# Altium PCB led_supply.PcbDoc
Units mm, origin at the board's own origin, x right, y up, seen from the top; angles counter-clockwise.
Board outline 77 x 77 mm, 2 copper layers (Top Layer, Bottom Layer), stack 1.536 mm thick; 20 components, 7 nets, 44 pads, 239 vias.
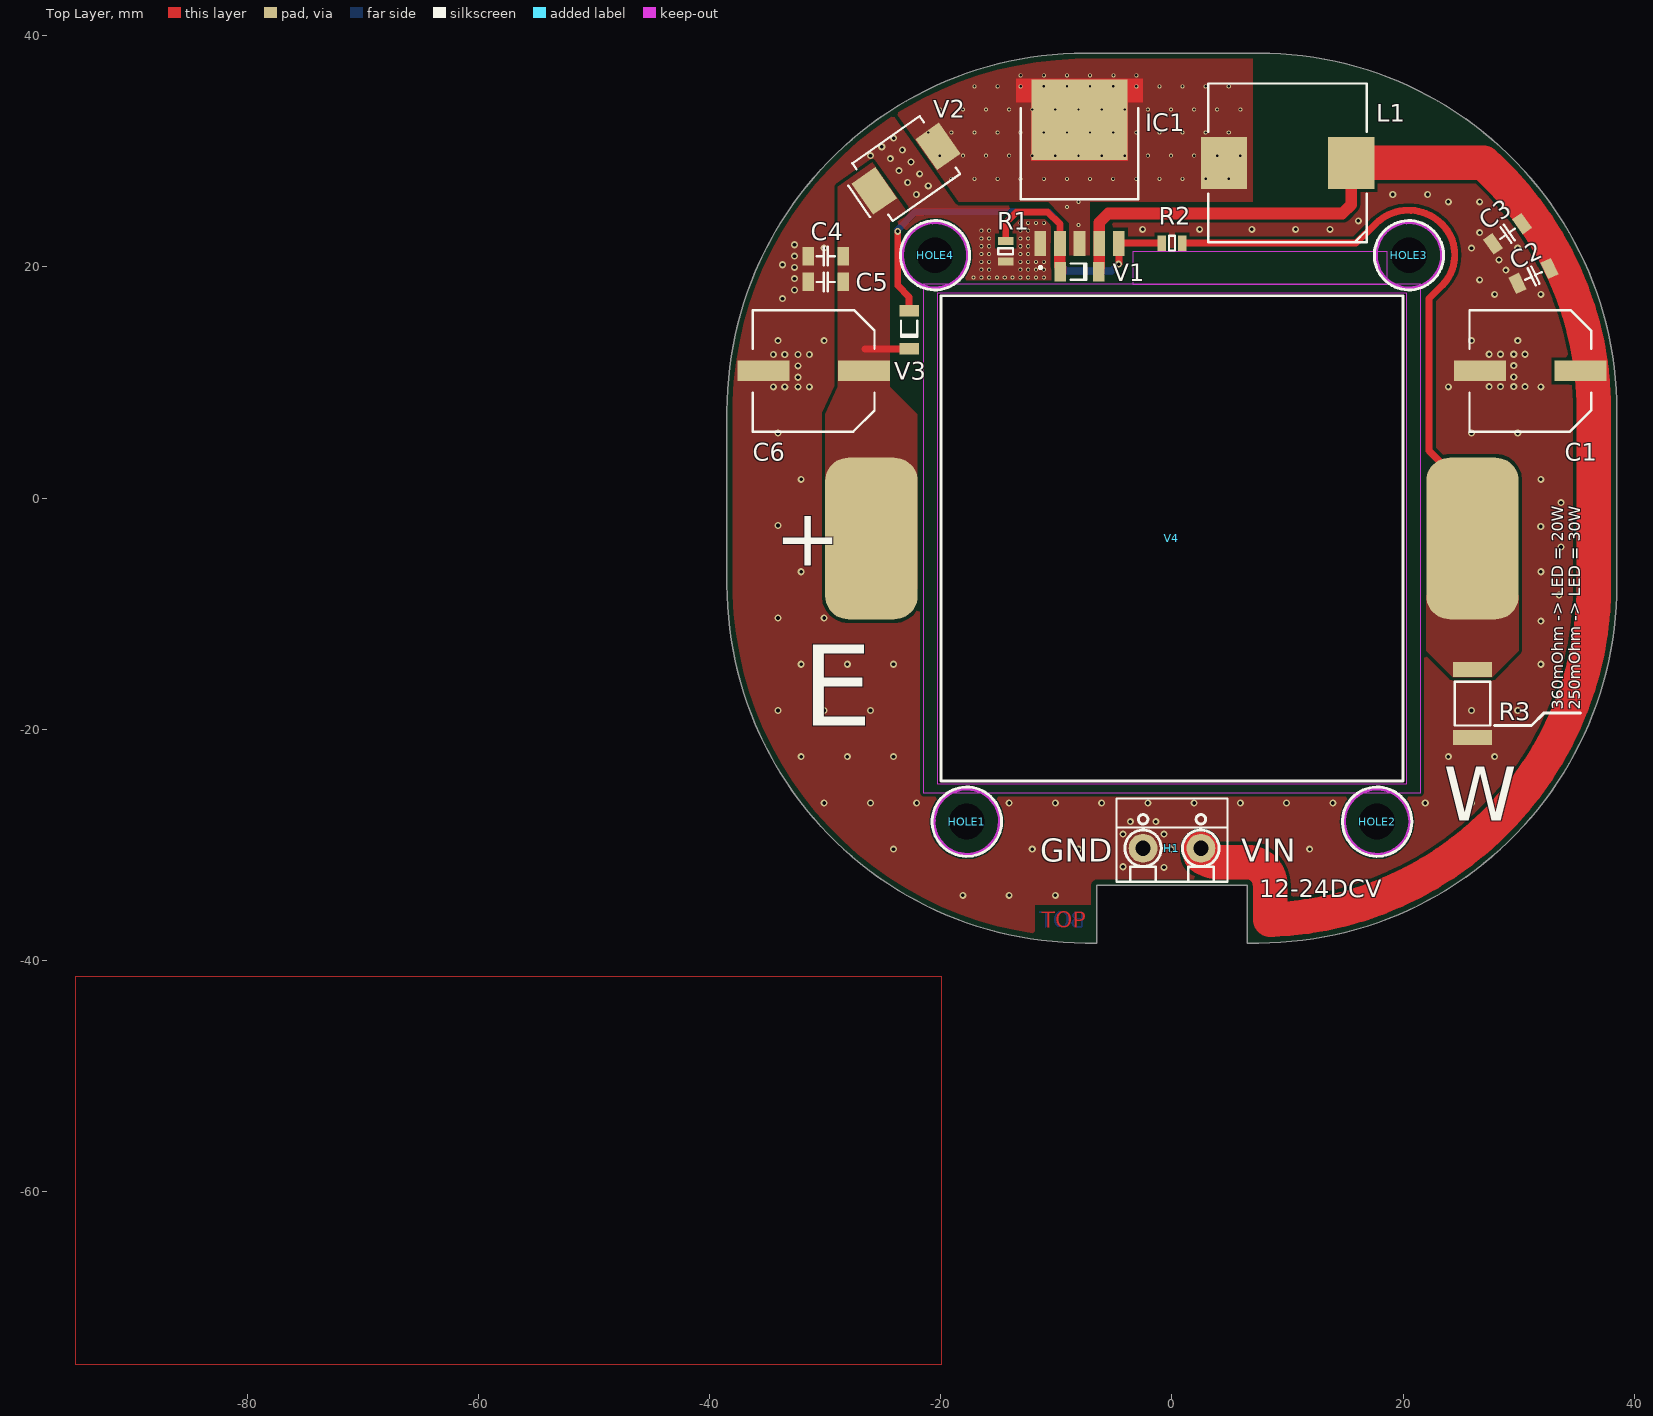
[diagram p0: Top Layer view]
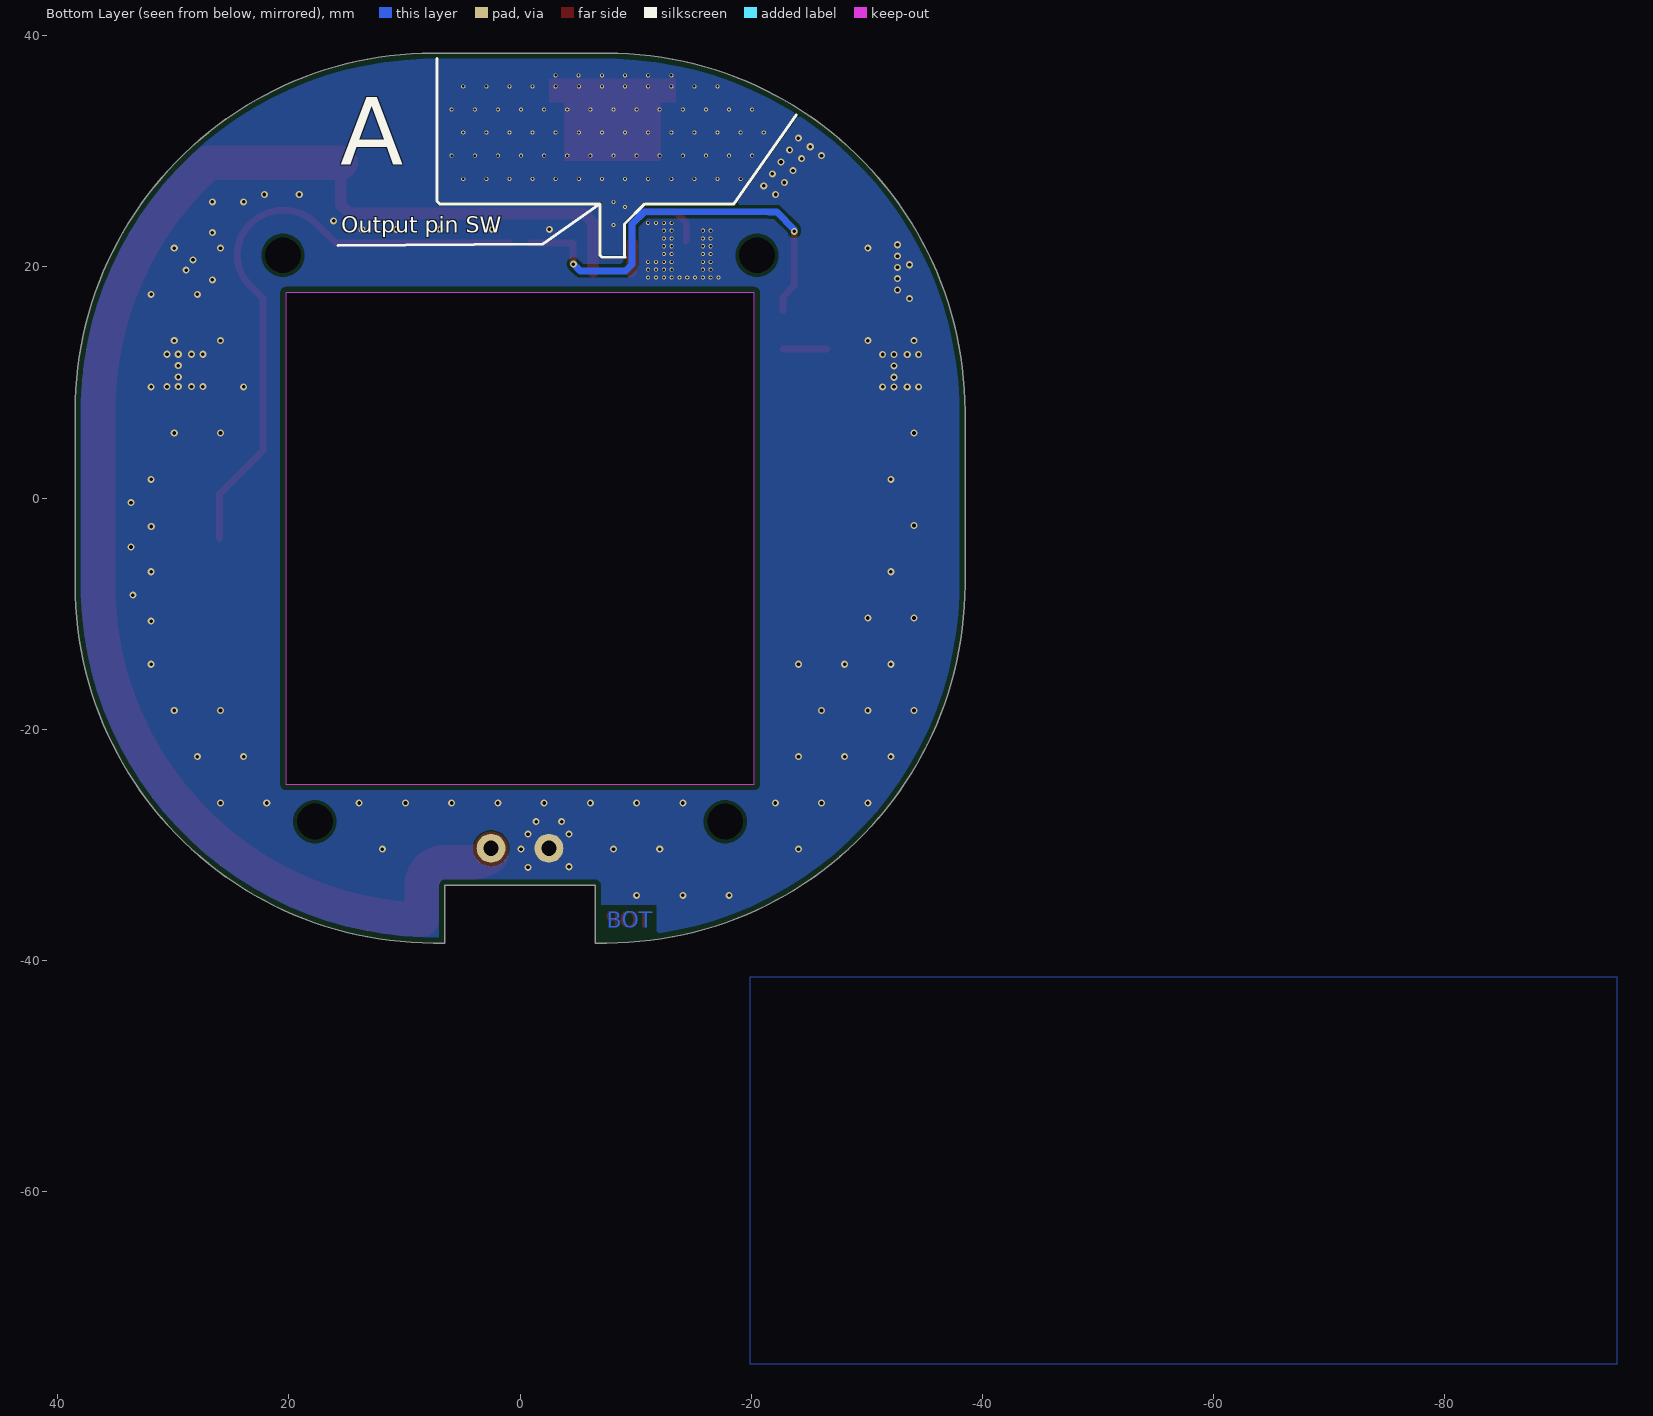
[diagram p1: Bottom Layer view, seen from below]
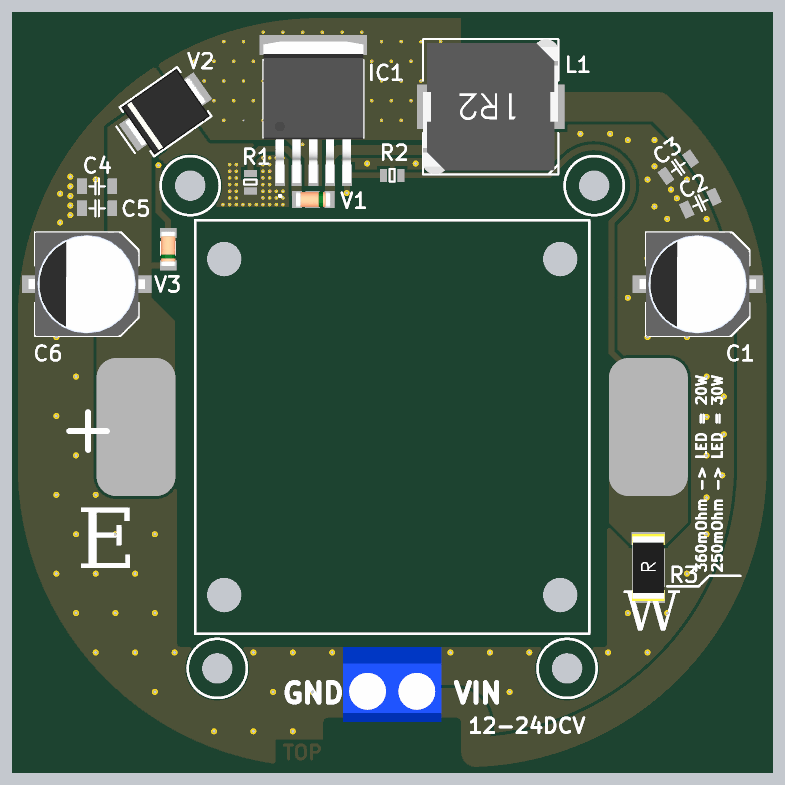
[diagram p2: 3D render of the assembled board from above, using the file's embedded part models]

## Layer stack, top to bottom
Top Solder: solder mask 0.0102, Solder Resist, Dk 3.5
Top Layer: signal copper 0.018
Dielectric1: core 1.5, FR-4, Dk 4.1
Bottom Layer: signal copper 0.018
Bottom Solder: solder mask 0.0102, Solder Resist, Dk 3.5

## Board outline
-38.5,-7.5 ccw(c-7.5,-7.5) -7.5,-38.5 -6.5,-38.5 -6.5,-33.5 6.5,-33.5 6.5,-38.5 7.5,-38.5 ccw(c7.5,-7.5) 38.5,-7.5 38.5,7.5 ccw(c7.5,7.5) 7.5,38.5 -7.5,38.5 ccw(c-7.5,7.5) -38.5,7.5
cut-out: -20.25,-24.75 -20.25,17.75 20.25,17.75 20.25,-24.75

## Design rules (kind name [scope] priority, off if disabled: settings)
BoardOutlineClearance [All] p1: gap=0.5 ignorepadtopadclearanceinfootprint=FALSE
Clearance [All] p1: gap=0.3 ignorepadtopadclearanceinfootprint=FALSE
HoleSize [All] p1: absolutevalues=TRUE maxlimit=7.62 minlimit=0.025 maxpercent=80.000 minpercent=20.000
MinimumSolderMaskSliver [All] p1: minsoldermaskwidth=0.08
PlaneClearance [All] p1: clearance=0.5
PolygonConnect [All] p1: connectstyle=Direct reliefconductorwidth=0.3 reliefentries=4 polygonreliefangle="45 Angle" airgapwidth=0.3
RoutingVias [All] p1: holewidth=0.4 width=0.6 viastyle="Through Hole" minholewidth=0.3 minwidth=0.6 maxholewidth=0.3 maxwidth=1.2
SilkToSilkClearance [All] p1: silktosilkclearance=0.1
SilkToSolderMaskClearance [IsPad] p1: minsilkscreentomaskgap=0.1 clearancetoexposedcopper=TRUE
SolderMaskExpansion SolderMaskExpansion_1 [InComponent('H1')] p1: expansion=0.2 istentingtop=FALSE
SolderMaskExpansion [All] p2: expansion=0 istentingtop=FALSE soldermaskfromhole=TRUE
Width [All] p1: maxlimit=3 minlimit=0.2 preferedwidth=0.3 minimp=50.000000 maximp=50.000000 favimp=50.000000
25 further rules are at their usual default settings.

## Components (designator, comment, footprint, x,y, rotation, side; value= is the part's Value field where it differs from the comment)
C1 "100u" sm_cap_elyt10m 31,11 r270 top
C2 "1.00u" sm_cap_1206 31.277,19.211 r25 top
C3 "100n" sm_cap_1206 29.032,22.86 r35 top
C4 "1.00u" sm_cap_1206 -29.947,20.93 r0 top
C5 "100n" sm_cap_1206 -29.947,18.694 r0 top
C6 "100u" sm_cap_elyt10m -31,11 r270 top locked
H1 "DG301-5.0" TH_CON_2PIN_PIT197 0,-30.3 r180 top
HOLE1 "HOLE_30" TH_MCH_HOLE30M -17.75,-28 r90 top
HOLE2 "HOLE_30" TH_MCH_HOLE30M 17.75,-28 r90 top
HOLE3 "HOLE_30" TH_MCH_HOLE30M 20.5,21 r90 top
HOLE4 "HOLE_30" TH_MCH_HOLE30M -20.5,21 r90 top
IC1 "XL6006" XL6006 -8,34.5 r270 top locked
L1 "47u" sm_ind_SRP1270 10,29 r180 top locked
R1 "20.0k" sm_res_0805 -14.385,21.343 r90 top
R2 "1.00k" sm_res_0805 0,22.049 r180 top
R3 "360m" SM_RES_2512 26,-17.777 r90 top
V1 "BZV55C8V2" sm_dio_minimelf_d59_l140 -8.002,19.583 r0 top
V2 "B560C-13-F" sm_dio_smc -23,28.5 r215 top
V3 "BZV55C39" sm_dio_minimelf_d59_l140 -22.738,14.554 r270 top
V4 "LED" PWR_LED -20,-24.5 r0 top locked

## Footprints (in the part's own frame and the unit in brackets; to place one, negate y for a bottom-side part, rotate by r counter-clockwise, add the part's x,y. Pads: shape width x height; smd on the part's side, far side on the other; paste and mask are expansions set on the pad)
PWR_LED [mm]
  rrect50% 8x14 smd: 1(-6,21) 2(46,21)
  round 1.524 hole 3.5 unplated: ""(2.95,3.95) ""(2.95,38.05) ""(37.05,3.95) ""(37.05,38.05)
  silkscreen extent 0,0 40,42, body extent -6,0 46,42, height 1.9
sm_cap_1206 [mil]
  rect 39x63 smd: 1(-60,0) 2(60,0)
  silkscreen extent -31,-32 31,32, body extent -61,-32 61,32, height 70
sm_cap_elyt10m [mil] "SMD electrolytic capacitor dia 10mm"
  rect 70x177 smd: 1(0,171) 2(0,-171)
  silkscreen extent -207,-207 207,207, body extent -207,-232 207,232, height 408
sm_dio_minimelf_d59_l140 [mm] "Metal Electrode Face (MELF) Diode; Body 3.5 x 2.0 mm (LxDia), SOD80C"
  rect 1x1.7 smd: 1(-1.65,0) 2(1.65,0)
  silkscreen extent -0.77,-0.7 0.6,0.7, body extent -1.78,-0.82 1.73,0.83, height 1.64
sm_dio_smc [mm]
  rect 2.5x3.3 smd: 1(-3.365,0) 2(3.365,0)
  silkscreen extent -3.56,-3.05 4.95,3.05, body extent -3.98,-2.95 3.98,2.95, height 2.3
sm_ind_SRP1270 [mm] "Shielded Power Inductor"
  rect 4x4.5 smd: 1(-5.5,0) 2(5.5,0)
  silkscreen extent -6.86,-6.86 6.86,6.86, body extent -6.85,-6.85 6.85,6.85, height 7.01
sm_res_0805 [mil]
  rect 28x52 smd: 1(-35,0) 2(35,0)
  silkscreen extent -10,-25 10,25, body extent -41,-26 41,26, height 19
SM_RES_2512 [mm] "Chip Resistor, Body 6.3x3.2mm, IPC Medium Density"
  rect 1.3x3.4 smd: 1(-2.95,0) 2(2.95,0)
  silkscreen extent -1.9,-1.52 1.88,1.52, body extent -3.39,-1.66 3.41,1.64, height 0.64
TH_CON_2PIN_PIT197 [mm] "DG301-5 connector with srews 1,5mm wire"
  round 2.5 hole 1.3: 1(-2.5,0) 2(2.5,0)
  silkscreen extent -4.8,-4.3 4.8,2.9, body extent -5,-4.48 5,3.12, height 10.03
TH_MCH_HOLE30M [mm] "Hole dia 3mm, non-plated"
  round 0 hole 3.1 unplated: 1(0,0)
XL6006 [mm]
  rect 2.16x1.02 smd: 1(12.461,-3.4) 2(12.461,-1.7) 3(12.461,0) 4(12.461,1.7) 5(12.461,3.4)
  rect 6.99x8.33 smd paste+0 mask+0.102: 3(1.778,0)
  Top Layer region: -1.778,-5.461 -1.778,5.461 0.254,5.461 0.254,4.191 5.334,4.191 5.334,-4.191 0.254,-4.191 0.254,-5.461
  silkscreen extent 0.76,-5.08 14.68,5.08, body extent -1.11,-5.08 13.24,5.08, height 4.72

## Part data
C1 C6: library part CAP_000411, "CAP ELYT 47u 50V low ESR 10mm", Dielectric=elyt, Manuf Part Number=EEE-FC1H470P, Manufacturer=Panasonic, Max Oper Temperature=105, Min Oper Temperature=-40, Supp Part number=PCE4020CT-ND, Tolerance=20%, Voltage=63V, Active=1, Alternative=1, Cat1=Electrolytic, Cat2=G, ComponentLink1Description=Datasheet, ComponentLink1URL=https://riceproject.fel.zcu.cz/Altium/PDF/Passive/Capacitors/panasonic_FC.pdf, Designer="Jiri  Cengery", Exact price=1, Exact price 2=0, Exact price 3=0, FIT=2, ID=2290, LastRevisionDate=11.5.2011, LastRevisionNote="new release", ManufacturerID=Panasonic, ManufacturerURL=http://www.industrial.panasonic.com/, Marking=47HFC, Part Category=Electrolytic/G, Part Number=CAP_000411, Part Select=SCAP0003000700002470, Part type=CAP, PartNumber=CAP_000411, PartQuantity=1, PCB Status=Electrical, Preference=-1000, Price=19, Price 2=0, Price 3=0, Published=11.5.2011, Publisher="Libor Polacek", RoHS=1, Stock=21, Supplier=Digikey, Supplier2=N/A, Supplier3=N/A, SupplierID=Digikey, SupplierID2="no supplier", SupplierID3="no supplier", SupplierURL=http://www.digikey.com/, SupplierURL2=N/A, SupplierURL3=N/A
C2 C4: library part CAP_000356, "CAP CER 1.00u 100V X7R 10% 1206", Dielectric=X7R, Manuf Part Number=C3216X7R2A105K, Manufacturer="TDK Corporation", ManufacturerID=TDK, Max Oper Temperature=125, Min Oper Temperature=-55, Supp Part number=445-4467-2-ND, Tolerance=10%, Voltage=100V, Active=1, Alternative=1, Cat1=Ceramic, Cat2=1206, Cat3=X7R, ComponentLink1Description=Datasheet, ComponentLink1URL=https://riceproject.fel.zcu.cz/Altium/PDF/passive/capacitors/Cxxxx_TDK_100V.pdf, Designer=MaJa, Exact price=1, FIT=0,100000001490116, ID=360, LastRevisionDate=11.5.2011, LastRevisionNote="new release", ManufacturerURL=http://www.tdk.com/, Part Category=Ceramic/1206/X7R, Part Number=CAP_000356, Part Select=SCAP0001000500027100, Part type=CAP, PartNumber=CAP_000356, PartQuantity=1, PCB Status=Electrical, Price=2,24207997322083, Price 2=0, Price 3=0, Published=11.5.2011, Publisher="Libor Polacek", Quantity=1, RoHS=1, Stock=9, Supplier=Digikey, Supplier2=N/A, Supplier3=N/A, SupplierID=Digikey, SupplierID2="no supplier", SupplierID3="no supplier", SupplierURL=http://www.digikey.com/, SupplierURL2=N/A, SupplierURL3=N/A
C3 C5: library part CAP_000351, "CAP CER 100n 100V X7R 10% 1206", Dielectric=X7R, Manuf Part Number=12061C104KAT2A, Manufacturer=AVX, Max Oper Temperature=125, Min Oper Temperature=-55, Supp Part number=478-1529-2-ND, Tolerance=10%, Voltage=100V, Active=1, Alternative=1, Cat1=Ceramic, Cat2=1206, Cat3=X7R, ComponentLink1Description=Datasheet, ComponentLink1URL=https://riceproject.fel.zcu.cz/Altium/PDF/passive/capacitors/xxxxC_AVX.pdf, Designer=MaJa, Exact price=1, FIT=0,100000001490116, ID=355, LastRevisionDate=11.5.2011, LastRevisionNote="new release", ManufacturerID=AVX, ManufacturerURL=http://www.avx.com/, Part Category=Ceramic/1206/X7R, Part Number=CAP_000351, Part Select=SCAP0001000500026100, Part type=CAP, PartNumber=CAP_000351, PartQuantity=1, PCB Status=Electrical, Price=0,62279999256134, Price 2=0, Price 3=0, Published=11.5.2011, Publisher="Libor Polacek", Quantity=1, RoHS=1, Stock=0, Supplier=Digikey, Supplier2=N/A, Supplier3=N/A, SupplierID=Digikey, SupplierID2="no supplier", SupplierID3="no supplier", SupplierURL=http://www.digikey.com/, SupplierURL2=N/A, SupplierURL3=N/A
H1: library part CON_000079, "CON 2pin power 197mill", Manuf Part Number=DG301-5.0-02P-12, Manufacturer=DEGSON, Max Oper Temperature=120, Min Oper Temperature=-30, Supp Part number=DG301-5.0-2P12, Active=1, Alternative=1, Cat1=Power, ComponentLink1Description=Datasheet, ComponentLink1URL=https://riceproject.fel.zcu.cz/Altium/PDF/Passive/Connectors/dg301-5.0.pdf, Designer="Tomáš Košan", Exact price=1, ID=1796, LastRevisionDate=15.6.2011, LastRevisionNote="Initial version", ManufacturerID=DEGSON, ManufacturerURL=http://www.degson.com/, Part Category=Power, Part Number=CON_000079, Part Select=TCON0004000000001500, Part type=CON, PartNumber=CON_000079, PartQuantity=1, PCB Status=Electrical, Pin=2, Price=3,84999990463257, Price 2=0, Price 3=0, Published=15.6.2011, Publisher=Turjanica, RoHS=1, Stock=0, Supplier=TME, Supplier2=N/A, Supplier3=N/A, SupplierID=TME, SupplierID2="no supplier", SupplierID3="no supplier", SupplierURL=http://www.tme.eu/cz/, SupplierURL2=N/A, SupplierURL3=N/A
HOLE1 HOLE2 HOLE3 HOLE4: library part MCH_000055, "MCH test hole 3mm no pad", Manuf Part Number=x, ManufacturerID="no manufacturer", Max Oper Temperature=200, Min Oper Temperature=-60, Active=1, Alternative=1, Cat1=Virtual, Cat2="Mounting holes", ComponentLink1Description=Datasheet, Designer="Jiri Cengery", Exact price=0, Exact price 2=0, Exact price 3=0, FIT=0, Function Type=hole, ID=2632, LastRevisionDate=8.11.2013, LastRevisionNote="new release", Part Category="Virtual/Mounting holes", Part Number=MCH_000055, Part Select=TMCH0002000400000000, Part type=MCH, PartNumber=MCH_000055, PartQuantity=1, PCB Status=Virtual, Preference=0, Price=0, Price 2=0, Price 3=0, Publisher="Jiri Svarny", Publishied=8.11.2013, RoHS=1, Stock=0, Supp Part number=x, Supplier=N/A, Supplier2=N/A, Supplier3=N/A, SupplierID="no supplier", SupplierID2="no supplier", SupplierID3="no supplier", SupplierURL=N/A, SupplierURL2=N/A, SupplierURL3=N/A
IC1: "180KHz 60V 5A Switching Current Boost LED Constant Current Driver", Manufacturer_Name=Xlsemi, Datasheet Link=http://www.xlsemi.net/datasheet/XL6006%20datasheet-English.pdf, Manufacturer_Part_Number=XL6006
L1: library part IND_000080, "IND 47u 5A 13.7x13.7mm ferrite", DC Current=14A, Manuf Part Number=SRP1270-5R6M, Manufacturer="Bourns Inc.", ManufacturerID=Bourns, Max Oper Temperature=125, Min Oper Temperature=-55, Resistance=10m, Supp Part number=SRP1270-5R6MDKR-ND, Tolerance=20%, Active=1, Alternative=1, Cat1=Shielded, Cat2=Standard, ComponentLink1Description=Datasheet, ComponentLink1URL=https://riceproject.fel.zcu.cz/Altium/PDF/Passive/Inductors/SRP1270_Bourns.pdf, Designer="Jiri Svarny", Exact price=1, Exact price 2=0, Exact price 3=0, FIT=0,100000001490116, ID=4984, LasrRevisionNote="new release", LastRevisionDate=11.5.2011, ManufacturerURL=http://www.bourns.com, Part Category=Shielded/Standard, Part Number=IND_000080, Part Select=SIND0001000100005220, Part type=IND, PartNumber=IND_000080, PartQuantity=1, PCB Status=Electrical, Preference=1, Price=30,5, Price 2=0, Price 3=0, Publisher="Libor Polacek", Publishied=11.5.2011, RoHS=1, Stock=0, Supplier=Digikey, Supplier2=N/A, Supplier3=N/A, SupplierID=Digikey, SupplierID2="no supplier", SupplierID3="no supplier", SupplierURL=http://www.digikey.com/, SupplierURL2=N/A, SupplierURL3=N/A
R1: library part RES_000274, "RES 0805 20.0k 1% 100ppm SMD thick film", Manuf Part Number=ERJ6ENF2002V, Manufacturer=Panasonic, Max Oper Temperature=125, Min Oper Temperature=-55, Power=125mW, Supp Part number=P20.0kCTR-ND, Tolerance=1%, Active=1, Alternative=1, Cat1="Thick film", Cat2=0805, ComponentLink1Description=Datasheet, ComponentLink1URL=https://riceproject.fel.zcu.cz/Altium/PDF/passive/resistors/ERJ_EKF_Panasonic.pdf, Designer="Kamil Kosturik", Exact price=1, Exact price 2=0, Exact price 3=0, FIT=0,100000001490116, ID=635, LastRevisionDate=11.5.2011, LastRevisionNote="new release", ManufacturerID=Panasonic, ManufacturerURL=http://www.industrial.panasonic.com/, Part Category="Thick film/0805", Part Number=RES_000274, Part Select=SRES0001000400005200, Part type=RES, PartNumber=RES_000274, PartQuantity=1, PCB Status=Electrical, Preference=0, Price=0,0900000035762787, Price 2=0, Price 3=0, Published=11.5.2011, Publisher="Libor Polacek", Quantity=1, RoHS=1, Stock=70, Supplier=Digikey, Supplier2=N/A, Supplier3=N/A, SupplierID=Digikey, SupplierID2="no supplier", SupplierID3="no supplier", SupplierURL=http://www.digikey.com/, SupplierURL2=N/A, SupplierURL3=N/A, Thermal Stability=100ppm
R2: library part RES_000243, "RES 0805 1.00k 1% 100ppm SMD thick film", Manuf Part Number=ERJ6ENF1001V, Manufacturer=Panasonic, Max Oper Temperature=125, Min Oper Temperature=-55, Power=125mW, Supp Part number=P1.00kCTR-ND, Supp Part number 2=667-ERJ-6ENF1001V, Tolerance=1%, Active=1, Alternative=1, Cat1="Thick film", Cat2=0805, ComponentLink1Description=Datasheet, ComponentLink1URL=https://riceproject.fel.zcu.cz/Altium/PDF/passive/resistors/ERJ_EKF_Panasonic.pdf, Designer="Tomáš Košan", Exact price=1, Exact price 2=0, Exact price 3=0, FIT=0,100000001490116, ID=604, LastRevisionDate=11.5.2011, LastRevisionNote="new release", ManufacturerID=Panasonic, ManufacturerURL=http://www.industrial.panasonic.com/, Part Category="Thick film/0805", Part Number=RES_000243, Part Select=SRES0001000400004100, Part type=RES, PartNumber=RES_000243, PartQuantity=1, PCB Status=Electrical, Preference=0, Price=0,0900000035762787, Price 2=2,4300000667572, Price 3=0, Published=11.5.2011, Publisher="Libor Polacek", Quantity=1, RoHS=1, Stock=1225, Supplier=Digikey, Supplier2="Mouser Electronics", Supplier3=N/A, SupplierID=Digikey, SupplierID2=Mouser, SupplierID3="no supplier", SupplierURL=http://www.digikey.com/, SupplierURL2=http://www.mouser.com, SupplierURL3=N/A, Thermal Stability=100ppm
R3: library part RES_000543, "RES 2512 0.0R 1.5W SMD thick film", Manuf Part Number=CRCW25120000Z0EGHP, Manufacturer=Vishay, Max Oper Temperature=125, Min Oper Temperature=-55, Power=2W, Supp Part number=541-0.0RBCT-ND, Tolerance=1%, Active=1, Alternative=1, Cat1="Thick film", Cat2=2512, ComponentLink1Description=Datasheet, ComponentLink1URL=https://riceproject.fel.zcu.cz/Altium/PDF/passive/resistors/Resistor_Vishay.pdf, Designer="Jiri  Cengery", Exact price=0, FIT=1, ID=1743, LastRevisionDate=11.5.2011, LastRevisionNote="new release", ManufacturerID=Vishay, ManufacturerURL=http://www.vishay.com/, Marking=0, Part Category="Thick film/2512", Part Number=RES_000543, Part Select=SRES0001001000000000, Part type=RES, PartNumber=RES_000543, PartQuantity=1, PCB Status=Electrical, Preference=0, Price=16, Price 2=0, Price 3=0, Published=11.5.2011, Publisher="Libor Polacek", RoHS=1, Stock=0, Supplier=Digikey, Supplier2=N/A, Supplier3=N/A, SupplierID=Digikey, SupplierID2="no supplier", SupplierID3="no supplier", SupplierURL=http://www.digikey.com/, SupplierURL2=N/A, SupplierURL3=N/A, Thermal Stability=100ppm
V1 V3: library part DIO_000033, "DIO Diode zener 8V2; 500mW; miniMELF", Manuf Part Number=BZV55C8V2-TP, Manufacturer="Micro Commercial Components Corp.", ManufacturerID="Micro Commercial", Max Oper Temperature=150, Min Oper Temperature=-55, Supp Part number=BZV55C8V2-TPMSCT-ND, Voltage=8.2V, Active=1, Alternative=1, Cat1=Zener, ComponentLink1Description=Datasheet, ComponentLink1URL=https://riceproject.fel.zcu.cz/Altium/PDF/Semiconductor/Analog/Diode/Zener/BZV55C_MicroCommercial.pdf, Designer="Jiri Cengery", Exact price=1, Exact price 2=0, Exact price 3=0, FIT=2, ID=2320, LastRevisionDate=11.5.2011, LastRevisionNote="new release", ManufacturerURL=http://mccsemi.com, Part Category=Zener, Part Number=DIO_000033, Part Select=SDIO0003000000000000, Part type=DIO, PartNumber=DIO_000033, PartQuantity=1, PCB Status=Electrical, Preference=0, Price=3,1800000667572, Price 2=0, Price 3=0, Published=11.5.2011, Publisher="Libor Polacek", RoHS=1, Stock=44, Supplier=Digikey, Supplier2=N/A, Supplier3=N/A, SupplierID=Digikey, SupplierID2="no supplier", SupplierID3="no supplier", SupplierURL=http://www.digikey.com/, SupplierURL2=N/A, SupplierURL3=N/A
V2: library part DIO_000095, "DIO Schottky 40V 5A SMC", Current=5A, Manuf Part Number=B540C-13-F, Manufacturer="DIODES incorporated", Max Oper Temperature=150, Min Oper Temperature=-55, Supp Part number=1843671, Voltage=40V, Active=1, Alternative=1, Cat1=Schottky, ComponentLink1Description=Datasheet, ComponentLink1URL=https://riceproject.fel.zcu.cz/Altium/PDF/Semiconductor/Analog/Diode/2238476.pdf, Designer="Jiri  Cengery", Exact price=1, Exact price 2=0, Exact price 3=0, FIT=2, ID=5170, LastRevisionDate=11.5.2011, LastRevisionNote="new release", ManufacturerID="DIODES incorporated", ManufacturerURL=http://www.diodes.com, Part Category=Schottky, Part Number=DIO_000095, Part Select=SDIO0002000000000000, Part type=DIO, PartNumber=DIO_000095, PartQuantity=1, PCB Status=Electrical, Preference=0, Price=13, Price 2=0, Price 3=0, Published=11.5.2011, Publisher="Libor Polacek", RoHS=1, Stock=0, Supplier=Farnell, Supplier2=N/A, Supplier3=N/A, SupplierID=Farnell, SupplierID2="no supplier", SupplierID3="no supplier", SupplierURL=http://cz.farnell.com/, SupplierURL2=N/A, SupplierURL3=N/A
V4: "Power LED 20 - 100W (40x42mm))"

## Via types
v1: diameter 0.61, hole 0.315, Top Layer to Bottom Layer, 119 vias
v2: diameter 0.35, hole 0.2, Top Layer to Bottom Layer, 118 vias
v3: diameter 0.6, hole 0.3, Top Layer to Bottom Layer, 2 vias

## Nets (pads, with @x,y where several pads share a name; then routed paths per layer and width w, separated by ;. In a path a pad name is that pad's centre, name@x,y a point inside that pad or via, vN(x,y) a via of type N, cw(c..) or ccw(c..) an arc to the next point about the centre after c; other vN are vias at no path point)
EN: IC1.2 R1.2 V1.1 | length 11.2
  Top Layer w0.6: R1.2 -14.385,23.81 -13.451,24.744 -10.752,24.744 -9.7,23.692 IC1.2
  Top Layer w1: IC1.2 -9.7,20.007 -9.627,19.933 V1.1@-9.627,19.583
FB: IC1.5 R2.2 V3.1 | length 37.1
  Top Layer w0.6: v3(-23.724,23.063) -23.724,18.373 -22.738,17.387 V3.1 ; v3(-4.623,20.244) -4.6,20.267 IC1.5 -4.59,22.049 R2.2
  Bottom Layer w0.6: v3(-23.724,23.063) -23.724,23.241 -22.221,24.744 -21.5,24.744 -21.479,24.765 -10.747,24.765 -9.677,23.695 -9.677,20.193 -9.139,19.654 -5.212,19.654 v3(-4.623,20.244)
GND: C1.2 C2.1 C3.1 C4.1 C5.1 C6.2 H1.2 IC1.1 R1.1 R3.1
  other v1: -18.088,-34.381 -14.088,-34.381 -10.088,-34.381 -0.686,-31.953 -4.242,-31.9 -24.088,-30.381 -12.088,-30.381 -8.088,-30.381 -0.088,-30.381 11.912,-30.381 -4.242,-29.083 -0.686,-29.083 -3.6,-28 -1.4,-28 -30.088,-26.381 -26.088,-26.381 -22.088,-26.381 -14.088,-26.381 -10.088,-26.381 -6.088,-26.381 -2.088,-26.381 1.912,-26.381 5.912,-26.381 9.912,-26.381 13.912,-26.381 21.912,-26.381 25.912,-26.381 -32.088,-22.381 -28.088,-22.381 -24.088,-22.381 23.912,-22.381 27.912,-22.381 -34.088,-18.381 -30.088,-18.381 -26.088,-18.381 25.912,-18.381 29.912,-18.381 -32.088,-14.381 -28.088,-14.381 -24.088,-14.381 31.912,-14.381 31.912,-10.649 -34.088,-10.381 -30.088,-10.381 33.5,-8.407 -32.088,-6.381 31.912,-6.381 33.655,-4.242 31.902,-2.464 -34.088,-2.381 33.655,-0.406 -32.088,1.619 31.912,1.619 -34.088,5.619 25.912,5.619 29.912,5.619 -34.483,9.619 -33.503,9.619 -32.36,9.619 -31.379,9.619 23.912,9.619 27.442,9.634 28.423,9.634 29.566,9.634 30.546,9.634 31.912,9.619 -32.36,10.449 29.566,10.465 -32.36,11.43 29.566,11.445 -34.483,12.421 -33.503,12.421 -32.36,12.421 -31.379,12.421 27.442,12.436 28.423,12.436 29.566,12.436 30.546,12.436 -34.088,13.619 -30.088,13.619 25.912,13.619 29.912,13.619 -33.696,17.252 27.912,17.619 31.912,17.619 -32.664,18 26.619,18.879 -32.664,18.981 28.887,19.716 -32.664,19.949 -33.696,20.182 28.296,20.599 -32.664,20.93 -30.088,21.619 25.912,21.619 29.912,21.619 -32.664,21.91 26.619,22.962 -2.539,23.241 2.388,23.241 6.909,23.241 10.693,23.241 13.665,23.241 16.129,23.978 23.912,25.619 26.619,25.619 -22.119,26.264 19.101,26.264 22.123,26.264 -21.088,27.011 -22.867,27.295 -21.835,28.043 -23.615,28.326 -22.583,29.074 -24.362,29.358 -26.088,29.619 -23.331,30.106 -25.11,30.389 -24.079,31.137
  other v2: -17.175,19.075 -16.499,19.075 -15.822,19.075 -15.146,19.075 -14.47,19.075 -13.793,19.075 -13.117,19.075 -12.44,19.075 -11.764,19.075 -11.088,19.075 -16.499,19.752 -15.822,19.752 -13.117,19.752 -12.44,19.752 -11.764,19.752 -11.088,19.752 -16.499,20.428 -15.822,20.428 -13.117,20.428 -12.44,20.428 -11.764,20.428 -11.088,20.428 -16.499,21.105 -15.822,21.105 -13.117,21.105 -12.44,21.105 -16.499,21.781 -15.822,21.781 -13.117,21.781 -12.44,21.781 -16.499,22.457 -15.822,22.457 -13.117,22.457 -12.44,22.457 -16.499,23.134 -15.822,23.134 -13.117,23.134 -12.44,23.134 -13.117,23.81 -12.44,23.81 -11.764,23.81 -11.088,23.81
NetR2_1: R2.1 R3.2 V4.2 | length 53.6
  Top Layer w0.254: 23.363,23.678 cw(c20.588,20.892) 23.375,23.666
  Top Layer w0.6: R2.1 15.938,22.049 17.635,23.746 cw(c20.465,20.848) 23.362,23.678 ; 23.375,23.666 cw(c20.729,21.031) 23.375,18.397 22.25,17.272 22.25,4.089 26,0.34 V4.2
SW: IC1.3 L1.2 V2.1
  other v2: -8.088,23.619 -9.088,25.181 -8.088,25.619 -19.088,27.619 -17.088,27.619 -15.088,27.619 -13.088,27.619 -11.088,27.619 -9.088,27.619 -7.088,27.619 -5.088,27.619 -3.087,27.619 -1.087,27.619 0.913,27.619 2.913,27.619 4.913,27.619 -20.088,29.619 -18.088,29.619 -16.088,29.619 -14.088,29.619 -12.088,29.619 -10.088,29.619 -8.088,29.619 -6.088,29.619 -4.088,29.619 -2.087,29.619 -0.087,29.619 1.913,29.619 3.913,29.619 5.913,29.619 -21.088,31.619 -19.088,31.619 -17.088,31.619 -15.088,31.619 -13.088,31.619 -11.088,31.619 -9.088,31.619 -7.088,31.619 -5.088,31.619 -3.087,31.619 -1.087,31.619 0.913,31.619 2.913,31.619 4.913,31.619 -20.088,33.619 -18.088,33.619 -16.088,33.619 -14.088,33.619 -12.088,33.619 -10.088,33.619 -8.088,33.619 -6.088,33.619 -4.088,33.619 -2.087,33.619 -0.087,33.619 1.913,33.619 3.913,33.619 5.913,33.619 -17.088,35.619 -15.088,35.619 -13.088,35.619 -11.088,35.619 -9.088,35.619 -7.088,35.619 -5.088,35.619 -3.087,35.619 -1.087,35.619 0.913,35.619 2.913,35.619 4.913,35.619 -13.088,36.562 -11.088,36.562 -9.088,36.562 -7.088,36.562 -5.064,36.562 -3.087,36.562
VIN: C1.1 C2.2 C3.2 H1.1 IC1.4 L1.1 V1.2 | length 135.8
  Top Layer w1: V1.2@-6.327,19.583 -6.327,19.933 -6.3,19.96 IC1.4 -6.29,22.049 -6.29,23.834 -5.512,24.613 14.738,24.613 15.5,25.375 L1.1
  Top Layer w3: H1.1@2.5,-30.353 2.5,-30.96 ccw(c4.217,-28.5) 4.213,-31.5 6.5,-31.5 cw(c6.5,-33.5) 8.5,-33.5 8.5,-36.49 8.667,-36.48 9.858,-36.413 ccw(c9.686,-33.418) 10.019,-36.4 11.473,-36.236 ccw(c11.136,-33.255) 11.638,-36.213 13.079,-35.968 ccw(c12.574,-33.01) 13.24,-35.936 14.666,-35.61 ccw(c13.997,-32.686) 14.826,-35.569 16.232,-35.164 ccw(c15.399,-32.282) 16.387,-35.114 17.769,-34.631 ccw(c16.776,-31.8) 17.922,-34.572 19.273,-34.013 ccw(c18.124,-31.242) 19.424,-33.945 20.743,-33.31 ccw(c19.438,-30.609) 20.887,-33.236 22.166,-32.529 ccw(c20.715,-29.903) 22.311,-32.443 23.549,-31.666 ccw(c21.951,-29.127) 23.685,-31.575 24.876,-30.729 ccw(c23.14,-28.282) 25.011,-30.628 26.152,-29.718 ccw(c24.281,-27.373) 26.28,-29.61 27.368,-28.637 ccw(c25.369,-26.401) 27.489,-28.524 28.524,-27.489 ccw(c26.401,-25.369) 28.638,-27.368 29.61,-26.28 ccw(c27.373,-24.281) 29.718,-26.152 30.63,-25.009 ccw(c28.282,-23.14) 30.728,-24.878 31.573,-23.687 ccw(c29.127,-21.951) 31.667,-23.547 32.443,-22.311 ccw(c29.903,-20.715) 32.529,-22.166 33.235,-20.888 ccw(c30.609,-19.438) 33.311,-20.741 33.945,-19.425 ccw(c31.242,-18.124) 34.013,-19.272 34.572,-17.924 ccw(c31.8,-16.776) 34.632,-17.767 35.114,-16.39 ccw(c32.282,-15.399) 35.165,-16.229 35.569,-14.827 ccw(c32.686,-13.997) 35.611,-14.664 35.935,-13.242 ccw(c33.01,-12.574) 35.968,-13.077 36.212,-11.639 ccw(c33.255,-11.136) 36.236,-11.472 36.329,-10.649 ccw(c33.347,-10.315) 36.347,-10.315 36.347,-10.211 36.348,-10.208 ccw(c33.427,-9.523) 36.423,-9.691 36.495,-8.397 ccw(c33.5,-8.229) 36.5,-8.229 36.5,8.229 ccw(c33.5,8.229) 36.495,8.398 36.413,9.854 ccw(c33.418,9.686) 36.399,10.022 36.289,11 36.277,11.105 36.265,11.216 36.236,11.472 ccw(c33.255,11.136) 36.212,11.638 35.968,13.077 ccw(c33.01,12.574) 35.935,13.242 35.611,14.664 ccw(c32.686,13.997) 35.569,14.827 35.165,16.229 ccw(c32.282,15.399) 35.114,16.39 34.632,17.767 ccw(c31.8,16.776) 34.572,17.924 34.047,19.191 34.017,19.264 34.013,19.272 ccw(c31.242,18.124) 33.945,19.425 33.728,19.874 33.312,20.74 33.275,20.816 32.488,22.24 31.622,23.618 30.729,24.877 30.68,24.945 29.666,26.217 28.637,27.368 28.581,27.431 27.431,28.581 ; L1.1 26.962,29
VOUT: C4.2 C5.2 C6.1 V2.2 V3.2 V4.1 | length 3.8
  Top Layer w0.6: -26.568,12.878 -26.542,12.904 V3.2
pads on no net: HOLE1.1 HOLE2.1 HOLE3.1 HOLE4.1 V4.

## Polygon pours and split planes (outlines as drawn)
GND on Top Layer "GND_TOP" (solid, remove dead copper, pour order 38): -44.628,41.3 -44.628,44.983 47.015,44.983 47.015,-44.501 -44.628,-44.501
SW on Top Layer "SW" (solid, remove dead copper, pour order 36): -24.638,34.417 -14.385,38.474 6.985,38.499 6.985,25.619 -7.112,25.619 -7.112,20.984 -8.89,20.984 -8.89,23.784 -9.694,24.588 -10.725,25.619 -13.088,25.619 -18.44,25.619
NetR2_1 on Top Layer "NetR2_1" (solid, remove dead copper, pour order 31): 24.291,-15.493 21.996,-13.208 21.996,-8.407 29.997,-8.407 29.997,-13.208 27.712,-15.493
VOUT on Top Layer "VOUT" (solid, remove dead copper, pour order 9): -28.684,10.109 -29.997,7.239 -29.997,-7.874 -22.022,-7.874 -22.022,7.239 -24.892,10.109
VOUT on Top Layer "VOUT" (solid, remove dead copper, pour order 8): -28.905,9.627 -24.409,9.627 -24.409,23.839 -22.953,24.847 -25.924,29.033 -28.905,26.924
GND on Top Layer "Bottom Layer-No Net" (solid, remove dead copper, shelved, pour order 4): -94.906,-41.432 -94.906,-74.932 -19.906,-74.932 -19.906,-41.432
GND on Bottom Layer "GND_BOT" (solid, remove dead copper, pour order 39): -46.711,45.225 -46.711,48.908 44.933,48.908 44.933,-40.576 -46.711,-40.576
SW on Bottom Layer "SW" (solid, pour order 37): -24.638,34.417 -14.385,38.474 6.985,38.499 6.985,25.619 -7.112,25.619 -7.112,20.984 -8.89,20.984 -8.89,23.784 -9.694,24.588 -10.725,25.619 -13.088,25.619 -18.44,25.619
GND on Bottom Layer "Top Layer-GND" (solid, remove dead copper, shelved, pour order 3): -94.906,-41.432 -94.906,-74.932 -19.906,-74.932 -19.906,-41.432
SW on Bottom Solder "SW" (solid, pour order 34): -24.638,34.417 -14.385,38.474 6.985,38.499 6.985,25.619 -7.112,25.619 -7.112,20.984 -8.89,20.984 -8.89,23.784 -9.694,24.588 -10.725,25.619 -13.088,25.619 -18.44,25.619

## Keep-outs
Top Layer:
  rectangle: -3.404,18.496 18.644,21.311
  rectangle: -21.5,-25.5 21.5,18.5
  lines w0.254: -17.681,20.98 cw(c-20.5,21) -17.681,21 ; -14.931,-28.02 cw(c-17.75,-28) -14.931,-28 ; 20.569,-28.02 cw(c17.75,-28) 20.569,-28 ; 23.319,20.98 cw(c20.5,21) 23.319,21

## Other copper
Top Layer:
  text "TOP" at -11.257,-37.19 h1.4
Bottom Layer:
  text "BOT" at -7.514,-37.19 h1.4

## Silkscreen, mask and mechanical layers (free items; w line width, h text height)
Top Overlay:
  circle w0.254: c17.75,-28 r3
  circle w0.254: c-17.75,-28 r3
  circle w0.254: c20.5,21 r3
  circle w0.254: c-20.5,21 r3
  lines w0.254: 27.912,-19.677 31.097,-19.677 32.156,-18.618 35.331,-18.618
  text "+" at -34.35,-5.846 h5
  text "360mOhm -> LED = 20W / 250mOhm -> LED = 30W" at 35.331,-18.339 h1 r90
  text "E" at -32,-22 h12
  text "W" at 23.5,-29.5 h8
  text "GND" at -11.387,-31.453 h2
  text "VIN" at 5.986,-31.453 h2
  text "12-24DCV" at 7.539,-34.523 h1.5
Bottom Overlay:
  lines w0.254: -23.901,33.122 -18.491,25.451 -10.795,25.451 -9.042,23.698 -9.042,20.853 -9.068,20.828 -7.087,20.828 -6.934,20.98 -6.934,25.451 ; 7.188,38.024 7.188,25.679 6.96,25.451 -6.934,25.451 ; 15.748,21.844 -1.93,21.971 -6.934,25.451
  text "A" at 15.57,26.924 h10
  text "Output pin SW" at 15.462,22.968 h1.4
PCB Outline:
  lines w0.254: -38.5,-7.5 ccw(c-7.5,-7.5) -7.5,-38.5 -6.5,-38.5 -6.5,-33.5 0,-33.5 6.5,-33.5 6.5,-38.5 7.5,-38.5 ccw(c7.5,-7.5) 38.5,-7.5 38.5,7.5 ccw(c7.5,7.5) 7.5,38.5 -7.5,38.5 ccw(c-7.5,7.5) -38.5,7.5 -38.5,-7.5 ; -20.25,-24.75 20.25,-24.75 20.25,17.75 -20.25,17.75 -20.25,-24.75
Sheet:
  lines w0.076: -25.531,-108.02 -25.531,-87.954 -24.769,-87.954 134.977,-87.954 ; 20.443,-87.954 20.443,-108.04 20.697,-108.04 ; 20.697,-103.448 61.337,-103.448 ; 20.697,-97.86 134.997,-97.86 ; 20.697,-93.034 120.011,-93.034 ; 35.683,-93.034 35.683,-87.954 ; 61.083,-87.954 61.337,-87.954 61.337,-108.04 ; 61.337,-105.734 134.977,-105.734 ; 61.337,-102.178 134.977,-102.178 ; 108.073,-105.734 108.073,-97.86 ; 120.011,-97.86 120.011,-88.03
  lines w0.127: -156.665,-41.974 -151.585,-41.974 ; -156.595,28.759 -151.56,28.759 ; -107.364,-113.044 -107.364,-107.964 ; -106.17,91.827 -106.17,96.887 ; -58.215,-113.044 -58.215,-107.964 ; -57.021,91.827 -57.021,96.887 ; -9.066,-113.044 -9.066,-107.964 ; -7.745,91.827 -7.745,96.887 ; 40.21,-113.044 40.21,-107.964 ; 41.404,91.827 41.404,96.887 ; 89.359,-113.044 89.359,-107.964 ; 90.553,91.827 90.553,96.887 ; 135.257,-41.466 140.337,-41.466 ; 135.257,29.273 140.337,29.273 ; -151.56,-107.964 135.226,-107.964 135.226,91.827 -151.56,91.827 -151.56,-107.964
  lines w0.254: -156.62,-113.024 -156.62,96.907 140.306,96.907 140.306,-113.024 -156.62,-113.024
  text "Size:" at 22.867,-91.397 h2.43
  text "A4" at 29.2,-91.399 h2.43
  text "Date:" at 38.065,-91.399 h2.43
  text ".Print_Date" at 46.929,-91.399 h2.43
  text "Title:" at 62.149,-91.397 h2.43
  text ".pcb_author" at 31.664,-96.326 h1.95
  text "Author:" at 22.85,-96.402 h2.43
  text "Subtitle:" at 62.144,-96.402 h2.43
  text ".company" at -22.336,-97.85 h13.97
  text "Nr.:" at 62.144,-100.974 h2.43
  text "Revision:" at 110.302,-100.974 h2.43
  text "Checked by:" at 22.85,-101.482 h2.43
  text ".PCB_checked" at 36.566,-101.482 h1.95
  text ".CompanyName" at -22.751,-103.838 h1.95
  text "1" at 121.58,-104.353 h1.95
  text "1" at 130.445,-104.429 h1.95
  text "Type:" at 62.144,-104.454 h2.43
  text "Sheet" at 110.277,-104.454 h2.43
  text "of" at 125.492,-104.454 h2.43
  text ".typ" at 68.57,-104.53 h1.95
  text ".Address1" at -22.751,-106.359 h1.95
  text ".address2" at -7.554,-106.359 h1.95
  text ".PCB_approved" at 37.277,-106.512 h1.95
  text "Aprooved by:" at 22.85,-106.562 h2.43
  text "File:" at 62.144,-107.705 h2.43
  text ".Pcb_File_Name_No_Path" at 73.549,-107.705 h2.43
PCB Legend:
  drawing of 514 lines, arcs and shapes, not listed
  text "DRILL" at 14.964,81.742 h1.27
  text "File" at 113.084,81.259 h1.27
  text "Layer Name" at 73.46,81.229 h1.27
  text "Symbol" at 93.272,81.005 h1.27
  text "x" at 4.804,77.551 h1.27
  text "Finished diameter" at 8.36,77.551 h1.27
  text "Tool diameter" at 38.332,77.297 h1.27
  text "'.PCB_number'_ '.Global_revision''.PCB_revision'." at 99.387,72.93 h1.27
  text "GTO" at 116.767,72.872 h1.27
  text "SILKSCREEN" at 73.46,72.847 h1.27
  text "GTO" at 94.517,72.847 h1.27
  text "Nr. of drills:" at 4.296,72.344 h1.27
  text "'.PCB_number'_ '.Global_revision''.PCB_revision'." at 99.107,69.399 h1.27
  text "GTP" at 116.767,69.296 h1.27
  text "SOLDER PASTE" at 73.46,69.27 h1.27
  text "GTP" at 94.517,69.27 h1.27
  text "TOP" at 70.824,68.813 h1.27 r90
  text "OUTLINE" at 14.583,67.264 h1.27
  text "'.PCB_number'_ '.Global_revision''.PCB_revision'." at 98.802,65.538 h1.27
  text "GTS" at 116.767,65.486 h1.27
  text "SOLDER MASK" at 73.46,65.46 h1.27
  text "GTS" at 94.517,65.46 h1.27
  text "Cutted per unit" at 8.665,62.59 h1.27
  text "Milled by bridges" at 38.256,62.463 h1.27
  text "GTL" at 116.767,61.442 h1.27
  text "TOP LAYER" at 73.46,61.417 h1.27
  text "GTL" at 94.517,61.417 h1.27
  text "'.PCB_number'_ '.Global_revision''.PCB_revision'." at 98.599,61.17 h1.27
  text "Milled per unit" at 8.665,57.891 h1.27
  text "x" at 4.931,57.866 h1.27
  text "'V' grooved" at 38.256,57.764 h1.27
  text "Layer" at -125.441,55.031 h1.52
  text "Name" at -115.03,55.031 h1.52
  text "Material" at -91.414,55.031 h1.52
  text "Thickness" at -69.576,55.031 h1.52
  text "Constant" at -53.07,55.031 h1.52
  text "Board Layer Stack" at -38.596,55.031 h1.52
  text "No machining" at 8.665,53.192 h1.27
  text "Top Overlay" at -115.03,51.983 h1.52
  text "INNER" at 70.824,48.976 h1.27 r90
  text "Top Solder" at -115.03,48.935 h1.52
  text "Solder Resist" at -91.414,48.935 h1.52
  text "0,010mm" at -69.576,48.935 h1.52
  text "3.5" at -53.07,48.935 h1.52
  text "MILLING" at 14.329,47.071 h1.27
  text "1" at -125.441,45.887 h1.52
  text "Top Layer" at -115.03,45.887 h1.52
  text "0,018mm" at -69.576,45.887 h1.52
  text "x" at 4.728,43.032 h1.27
  text "Dielectric1" at -115.03,42.839 h1.52
  text "FR-4" at -91.414,42.839 h1.52
  text "1,500mm" at -69.576,42.839 h1.52
  text "4.1" at -53.07,42.839 h1.52
  text "Axis of line is" at 8.411,42.778 h1.27
  text "Axis of line is" at 38.002,42.651 h1.27
  text "GBL" at 116.767,41.254 h1.27
  text "BOTTOM LAYER" at 73.46,41.229 h1.27
  text "GBL" at 94.517,41.229 h1.27
  text "'.PCB_number'_ '.Global_revision''.PCB_revision'." at 99.31,41.104 h1.27
  text "2" at -125.441,39.791 h1.52
  text "Bottom Layer" at -115.03,39.791 h1.52
  text "0,018mm" at -69.576,39.791 h1.52
  text "border of milling" at 8.538,39.73 h1.27
  text "trace of milling" at 37.875,39.73 h1.27
  text "GBS" at 116.767,37.622 h1.27
  text "SOLDER MASK" at 73.46,37.597 h1.27
  text "GBS" at 94.517,37.597 h1.27
  text "'.PCB_number'_ '.Global_revision''.PCB_revision'." at 99.514,37.573 h1.27
  text "Bottom Solder" at -115.03,36.743 h1.52
  text "Solder Resist" at -91.414,36.743 h1.52
  text "0,010mm" at -69.576,36.743 h1.52
  text "3.5" at -53.07,36.743 h1.52
  text "MATERIAL" at 13.694,33.99 h1.27
  text "'.PCB_number'_ '.Global_revision''.PCB_revision'." at 99.107,33.966 h1.27
  text "GBP" at 116.767,33.914 h1.27
  text "SOLDER PASTE" at 73.46,33.888 h1.27
  text "GBP" at 94.517,33.888 h1.27
  text "Bottom Overlay" at -115.03,33.695 h1.52
  text "BOT" at 70.793,33.253 h1.27 r90
  text "GBO" at 116.767,30.281 h1.27
  text "SILKSCREEN" at 73.46,30.256 h1.27
  text "GBO" at 94.517,30.256 h1.27
  text "'.PCB_number'_ '.Global_revision''.PCB_revision'." at 99.183,30.131 h1.27
  text "x" at 4.601,29.316 h1.27
  text "FR4" at 8.284,29.062 h1.27
  text "Other" at 31.652,28.935 h1.27
  text "TRACK FINISH" at 13.948,23.068 h1.27
  text "GM1" at 116.767,19.486 h1.27
  text "BOARD OUTLINE" at 73.46,19.461 h1.27
  text "GM1" at 94.517,19.461 h1.27
  text "'.PCB_number'_ '.Global_revision''.PCB_revision'." at 98.802,19.463 h1.27
  text "x" at 4.67,18.802 h1.27
  text "HAL" at 8.03,18.394 h1.27
  text "Immersion gold" at 37.621,18.267 h1.27
  text "'.PCB_number'_ '.Global_revision''.PCB_revision'." at 98.802,16.059 h1.27
  text "TXT" at 116.767,15.905 h1.27
  text "DRILL POSITION" at 73.46,15.88 h1.27
  text "TXT" at 94.517,15.88 h1.27
  text "Immersion tin" at 7.903,12.908 h1.27
  text "Galvanic gold" at 37.494,12.781 h1.27
  text "'.PCB_number'_ '.Global_revision''.PCB_revision'." at 99.31,12.476 h1.27
  text "EXC" at 116.767,12.476 h1.27
  text "PLATED DRILL" at 73.46,12.451 h1.27
  text "EXC" at 94.517,12.451 h1.27
  text "TECHNOLOGY" at 70.971,8.641 h1.27 r90
  text "Organic coating" at 7.903,7.955 h1.27
  text "." at 25.327,7.442 h1.27
  text ".PCB_title" at 68.475,-90.951 h3.5
  text ".PCB_number" at 68.297,-100.476 h1.95
  text "'.Global_revision''.PCB_revision'" at 119.859,-100.882 h1.95
Top ASM Legend:
  text ".ASM_title" at 68.246,-91.281 h3.5
  text "TOP" at 125.574,-93.72 h1.5
  text ".ASM_number" at 68.068,-100.806 h1.95
  text ".Global_revision" at 121.027,-100.908 h1.95
  text ".ASM_revision" at 122.551,-100.908 h1.95
  text "2" at 130.216,-104.632 h1.95
Bot ASM Legend:
  lines w0.076: -151.642,-97.86 -37.342,-97.86 ; -151.622,-105.734 -77.982,-105.734 ; -151.622,-102.178 -77.982,-102.178 ; -151.622,-87.954 8.124,-87.954 ; -136.656,-97.86 -136.656,-88.03 ; -136.656,-93.034 -37.342,-93.034 ; -124.718,-105.734 -124.718,-97.86 ; -77.982,-108.04 -77.982,-87.954 ; -77.982,-103.448 -37.342,-103.448 ; -52.328,-93.034 -52.328,-87.954 ; -37.342,-108.04 -37.088,-108.04 -37.088,-87.954 ; 8.886,-108.02 8.886,-87.954
  lines w0.127: -156.62,-41.974 -151.647,-41.974 ; -156.6,28.765 -151.61,28.765 ; -107.4,-113.044 -107.4,-107.964 ; -106.181,91.827 -106.181,96.76 ; -58.251,-113.044 -58.251,-107.964 ; -57.032,91.833 -57.032,96.913 ; -9.102,-113.044 -9.102,-107.964 ; -7.756,91.827 -7.756,96.887 ; 40.174,-113.171 40.174,-108.091 ; 41.393,91.827 41.393,96.887 ; 89.323,-113.044 89.323,-107.964 ; 90.542,91.827 90.542,96.887 ; 135.156,29.267 140.204,29.267 ; 135.195,-41.39 140.275,-41.39 ; -151.61,-107.964 -151.61,91.827 135.156,91.827 135.156,-107.964 -151.61,-107.964
  lines w0.254: -156.62,96.282 -156.62,-113.024 140.236,-113.024 140.236,96.907 -156.512,96.907
  text ".ASM_title" at -84.62,-91.242 h1.95
  text "Title:" at -78.793,-91.397 h2.43
  text ".Print_Date" at -63.574,-91.399 h2.43
  text "Date:" at -54.709,-91.399 h2.43
  text "A4" at -45.844,-91.399 h2.43
  text "Size:" at -39.511,-91.397 h2.43
  text "BOT" at -142.466,-94.355 h1.5
  text ".pcb_author" at -48.308,-96.326 h1.95
  text "Subtitle:" at -78.788,-96.402 h2.43
  text "Author:" at -39.494,-96.402 h2.43
  text ".company" at 5.692,-97.85 h13.97
  text ".ASM_number" at -83.12,-100.742 h1.95
  text ".ASM_revision" at -137.513,-100.959 h1.95
  text ".Global_revision" at -136.243,-100.974 h1.95
  text "Revision:" at -126.947,-100.974 h2.43
  text "Nr.:" at -78.788,-100.974 h2.43
  text ".PCB_checked" at -53.21,-101.482 h1.95
  text "Checked by:" at -39.494,-101.482 h2.43
  text ".CompanyName" at 6.107,-103.838 h1.95
  text "2" at -138.224,-104.353 h1.95
  text "2" at -147.089,-104.429 h1.95
  text "of" at -142.136,-104.454 h2.43
  text "Sheet" at -126.921,-104.454 h2.43
  text "Type:" at -78.788,-104.454 h2.43
  text ".typ" at -85.214,-104.53 h1.95
  text ".address2" at -9.091,-106.359 h1.95
  text ".Address1" at 6.107,-106.359 h1.95
  text ".PCB_approved" at -53.922,-106.512 h1.95
  text "Aprooved by:" at -39.494,-106.562 h2.43
  text ".Pcb_File_Name_No_Path" at -90.193,-107.705 h2.43
  text "File:" at -78.788,-107.705 h2.43